# Altium PCB PCB.PcbDoc (part 2 of 3)
Units mm, origin at the board's own origin, x right, y up, seen from the top; angles counter-clockwise.
Board outline 152.4 x 101.6 mm, 2 copper layers (Top Layer, Bottom Layer); 124 components, 87 nets, 375 pads, 305 vias.
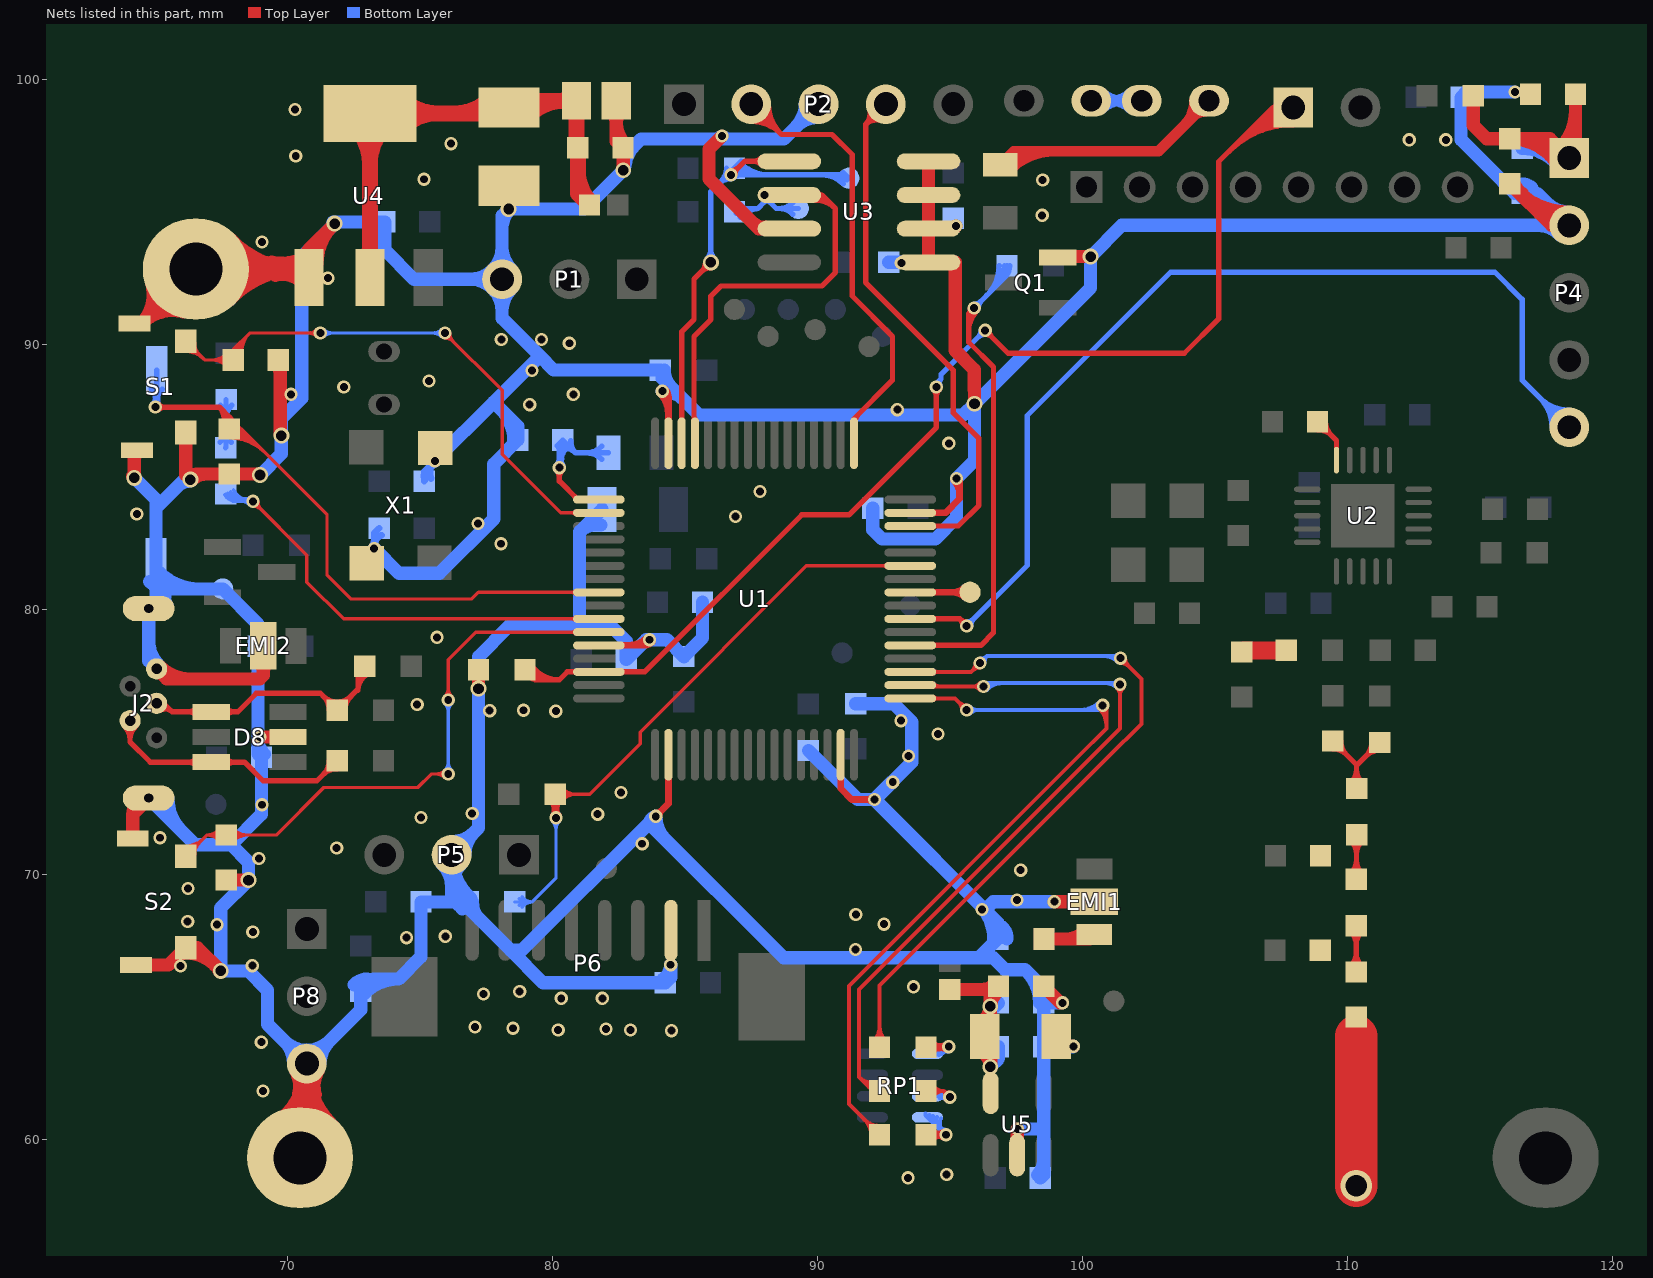
[diagram p2: the nets of this part, all layers, seen from the top]

## Via types
v1: diameter 0.5, hole 0.3, Top Layer to Bottom Layer, 278 vias
v2: diameter 0.6, hole 0.4, Top Layer to Bottom Layer, 23 vias
v3: diameter 0.8, hole 0.5, Top Layer to Bottom Layer, 2 vias
v4: diameter 0.8, hole 0.8, Top Layer to Bottom Layer, 2 vias

## Nets (pads, with @x,y where several pads share a name; then routed paths per layer and width w, separated by ;. In a path a pad name is that pad's centre, name@x,y a point inside that pad or via, vN(x,y) a via of type N, cw(c..) or ccw(c..) an arc to the next point about the centre after c; other vN are vias at no path point) (continued)
CO2_RDY: P4.5 U1.39 | length 43.3
  Top Layer w0.2: U1.39@93.505,79.641 95.365,79.641 v1(95.631,79.375) ; v1@95.481,79.375 ccw(c95.119,79.375) 95.375,79.631 ccw(c95.631,79.887) v1@95.631,79.525
  Bottom Layer w0.2: v1(95.631,79.375) 97.917,81.661 97.917,87.312 103.324,92.719 115.561,92.719 116.586,91.694 116.586,88.646 P4.5@118.364,86.868 ; v1@95.631,79.525 ccw(c95.631,79.887) 95.887,79.631 ccw(c96.143,79.375) v1@95.781,79.375 ; P4.5@117.714,86.868 ccw(c116.145,86.868) 117.254,87.978 ccw(c118.364,89.087) P4.5@118.364,87.518 ; P4.5@117.914,86.868 ccw(c116.828,86.868) 117.596,87.636 ccw(c118.364,88.404) P4.5@118.364,87.318
D_N: D8.6 J2.2 R13.1 | length 13.3
  Top Layer w0.2: J2.2@63.858,75.592 cw(c63.346,75.08) 64.07,75.08 cw(c64.794,75.08) J2.2@64.282,75.592 ; J2.2@64.07,75.804 64.07,74.995 64.831,74.234 D8.6@67.13,74.234 68.387,74.234 69.088,73.533 71.12,73.533 R13.1@71.882,74.295 ; D8.6@66.589,74.093 ccw(c66.247,73.751) 66.247,74.234 ccw(c66.247,74.717) D8.6@66.589,74.375 ; D8.6@67.671,74.093 cw(c68.013,73.751) 68.013,74.234 cw(c68.013,74.717) D8.6@67.671,74.375 ; 71.359,73.772 cw(c71.882,73.249) R13.1@71.882,73.989 ; 71.374,73.787 ccw(c70.873,74.289) R13.1@71.582,74.289
D_P: D8.4 J2.3 R14.1 R15.2 | length 15.6
  Top Layer w0.2: J2.3@65.07,76.454 65.339,76.454 65.659,76.134 ; J2.3@65.119,76.367 cw(c65.265,76.111) 65.474,76.319 ; J2.3@65.218,76.193 cw(c65.4,75.875) 65.659,76.134 ; D8.4@66.589,75.993 ccw(c66.247,75.651) 66.247,76.134 ccw(c66.247,76.617) D8.4@66.589,76.275 ; D8.4@67.671,75.993 cw(c68.013,75.651) 68.013,76.134 cw(c68.013,76.617) D8.4@67.671,76.275 ; 71.359,76.723 ccw(c71.882,77.246) 71.882,76.506 ccw(c71.882,77.246) 72.405,76.723 ; 71.374,76.708 cw(c70.873,76.206) R14.1@71.582,76.206 ; R14.1@72.182,76.206 cw(c72.891,76.206) 72.39,76.708 ; 72.672,76.953 cw(c73.366,76.953) R15.2@73.059,77.576 ; 72.672,77.275 cw(c73.207,77.275) R15.2@72.97,77.755 ; R15.2@72.672,77.978 72.672,76.99 R14.1@71.882,76.2 71.247,76.835 68.834,76.835 68.133,76.134 D8.4@67.13,76.134 65.659,76.134
GND: C1.2 C2.1 C4.2 C5.2 C6.2 C7.2 C8.1 C9.1 C10.1 C11.1 C12.1 C30.1 C31.2 C32.2 C33.2 C35.1 C36.1 C37.2 C38.1 C39.2 C40.2 C41.2 C42.1 C43.2 C44.1 C45.1 C46.1 C47.1 C48.1 C49.1 C50.1 C51.1 D8.2 EMI1.2 EMI2.2 GND.1 J2.5 P1.3 P2.3 P4.2 P5.2 P6.2 P8.3 pad.0 pad.1 Q1.1 R3.1 R5.1 R7.2 R11.1 R12.1 S1. S1.1 S2. S2.1 S3.1 U1.12 U1.18 U1.31 U1.47 U1.63 U3.1 U3.2 U3.3 U3.4 U3.7 U4.1 U5.2 X1.2 X1.4 | length 445.8
  Top Layer w0.254: U1.12@81.755,78.641 83.453,78.641 v1(83.665,78.853) ; 82.857,78.641 ccw(c82.857,79.66) v1@83.578,78.94 ; 83.47,78.641 ccw(c83.47,79.047) v1@83.757,78.76 ; v1@83.542,78.853 cw(c83.245,78.853) 83.455,78.643 cw(c83.665,78.433) v1@83.665,78.73 ; v1(83.902,72.192) 84.38,72.67 U1.18@84.38,74.516 ; v1@83.902,72.315 ccw(c83.902,72.612) 84.112,72.402 ccw(c84.322,72.192) v1@84.025,72.192 ; v1@84.063,88.145 cw(c83.297,87.379) 84.38,87.379 ; v1@84.15,88.109 cw(c84.15,87.812) 84.36,88.022 cw(c84.57,88.232) v1@84.273,88.232 ; v1(84.15,88.232) 84.38,88.002 U1.63@84.38,86.266 ; v1@84.242,88.324 cw(c83.91,87.992) 84.38,87.992 ; U1.31@90.88,74.516 90.88,73.24 91.294,72.826 v1(92.154,72.826) ; v1@92.067,72.739 ccw(c91.857,72.529) 91.857,72.826 ccw(c91.857,73.123) v1@92.067,72.913 ; U1.47@93.505,83.641 94.829,83.641 95.361,84.173 95.361,84.935 v1(95.245,84.935) ; v1@95.158,84.848 cw(c94.667,84.357) 95.361,84.357
  Top Layer w0.5: S2.@64.17,71.361 64.17,72.279 J2.5@64.77,72.879 ; 64.17,72.094 cw(c65.055,72.094) J2.5@64.429,72.72 ; 64.17,72.271 cw(c64.677,72.271) J2.5@64.395,72.692 ; v2@64.17,85.019 v2(64.227,84.962) 64.227,85.902 S1.@64.329,86.004 ; 64.227,85.637 cw(c64.695,85.637) S1.@64.364,85.968 ; S1.@64.24,90.779 S1.@64.49,90.779 ; S2.@64.29,66.586 65.52,66.586 S2.1@66.17,67.236 66.612,67.236 v2(67.489,66.359) ; pad.0@64.874,92.343 cw(c63.393,91.877) S1.@64.49,90.779 ; J2.5@65.07,77.754 65.447,77.377 68.961,77.377 69.098,77.513 EMI2.2@69.098,78.623 ; 65.074,91.363 ccw(c64.28,92.156) pad.0@65.351,92.492 ; 65.126,91.415 cw(c65.928,90.613) pad.0@66.186,91.717 ; J2.5@65.176,77.86 ccw(c66.343,79.027) 66.343,77.377 ; S2.1@65.829,66.895 cw(c66.17,66.553) 66.17,67.036 cw(c66.17,65.487) 67.265,66.582 ; pad.0@66.072,91.23 ccw(c65.687,89.583) S1.@64.49,90.779 ; 66.17,85.437 ccw(c66.886,85.437) v2@66.38,84.931 ; S1.1@66.17,86.667 66.17,85.07 v2(66.344,84.895) 66.555,85.106 C51.1@67.818,85.106 68.972,85.106 v2(68.972,85.068) ; v2@66.38,84.86 cw(c66.974,84.266) 66.974,85.106 ; pad.0@67.482,92.045 cw(c69.327,90.292) 69.327,92.837 cw(c69.327,95.382) pad.0@67.482,93.629 ; C7.2@67.691,69.785 v2(68.537,69.783) v2(68.537,69.783) ; pad.0@67.844,91.7 cw(c70.492,89.185) 70.492,92.837 cw(c70.492,96.489) pad.0@67.844,93.974 ; EMI2.2@68.921,78.046 cw(c68.494,77.619) 69.098,77.619 cw(c69.702,77.619) EMI2.2@69.275,78.046 ; v1(68.961,75.184) D8.2@70.03,75.184 ; 69.413,93.099 ccw(c69.803,94.702) U4.1@70.661,93.293 ; 69.554,92.609 cw(c69.812,91.547) U4.1@70.601,92.304 ; C6.2@69.555,89.295 cw(c69.113,88.853) 69.738,88.853 ; pad.1@69.611,60.64 ccw(c67.982,62.865) P8.3@70.739,62.865 ; 69.61,92.837 ccw(c69.61,94.244) U4.1@70.605,93.249 ; C6.2@69.661,89.408 69.738,89.331 69.738,86.595 v2(69.777,86.556) ; pad.1@69.906,60.237 ccw(c68.704,61.879) 70.739,61.879 ; P8.3@70.306,62.615 cw(c69.261,62.011) 70.427,61.699 cw(c71.592,61.387) P8.3@70.989,62.432 ; P8.3@70.385,62.511 cw(c69.532,61.658) 70.739,61.658 cw(c71.946,61.658) P8.3@71.093,62.511 ; pad.1@70.485,59.309 70.739,59.563 P8.3@70.739,62.865 ; P8.3@70.489,62.432 cw(c69.886,61.387) 71.051,61.699 cw(c72.218,62.011) P8.3@71.172,62.615 ; U4.1@70.617,93.037 cw(c71.458,93.037) 70.863,93.631 ; 70.739,61.676 ccw(c72.9,61.676) pad.1@71.389,60.131 ; U4.1@71.117,93.037 cw(c73.165,93.037) v2@71.717,94.485 ; pad.1@71.739,60.489 cw(c74.063,62.865) P8.3@70.739,62.865 ; v2(71.784,94.552) 70.817,93.585 U4.1@70.817,92.512 70.492,92.837 pad.0@66.548,92.837 S1.@64.49,90.779 ; v2(77.216,77.012) R12.1@77.216,77.724 ; C44.1@82.199,98.825 cw(c81.687,98.313) 82.411,98.313 cw(c83.135,98.313) C44.1@82.623,98.825 ; 82.411,98.381 ccw(c83.627,98.381) C45.1@82.767,97.522 ; C44.1@82.411,99.187 82.411,97.659 C45.1@82.661,97.409 82.677,97.393 v2(82.677,96.567) ; C45.1@82.555,97.296 cw(c82.26,97.002) 82.677,97.002 ; v1(86.403,97.862) 85.911,97.37 85.911,96.233 87.783,94.361 U3.7@88.942,94.361 ; 87.514,94.63 ccw(c88.042,95.158) U3.7@88.042,94.411 ; U3.4@94.192,96.901 U3.3@94.192,95.631 U3.2@94.192,94.361 ; U3.2@94.988,94.361 ccw(c94.988,94.7) v1(95.228,94.46) 95.128,94.361 U3.2@94.192,94.361 ; U3.1@95.057,93.056 cw(c94.72,92.719) 95.196,92.719 ; v2(95.929,87.757) 95.929,88.273 95.916,88.286 95.916,89.046 95.196,89.766 95.196,93.091 U3.1@94.192,93.091 U3.2@94.192,94.361 ; U5.2@97.536,59.404 97.536,60.387 v1(97.545,60.396) ; C50.1@98.536,65.786 99.166,65.156 v1(99.246,65.156) ; v1(98.938,68.971) EMI1.2@100.447,68.971 ; C47.1@99.013,63.881 C47.1@99.379,63.515 ; Q1.1@99.069,93.279 99.098,93.308 v2(100.306,93.308) ; C47.1@99.183,63.711 ccw(c99.656,64.184) v1(99.656,63.515) ; EMI1.2@99.87,68.794 ccw(c99.443,68.367) 99.443,68.971 ccw(c99.443,69.575) EMI1.2@99.87,69.148 ; C32.2@116.128,96.056 117.696,94.488 P4.2@118.364,94.488 cw(c118.364,96.101) 117.224,94.96 ; C32.2@116.28,96.095 ccw(c116.932,96.269) 116.594,95.684 ; C32.2@116.37,95.814 ccw(c118.364,97.808) P4.2@118.364,94.988 ; 67.254,66.589 cw(c67.054,66.242) 67.44,66.346 ccw(c67.054,66.242) 67.254,66.589
  Bottom Layer w0.254: v1@73.192,82.383 ccw(c72.982,82.593) 73.279,82.593 ccw(c73.576,82.593) v1@73.366,82.383 ; v1@73.279,82.395 cw(c73.703,82.395) C4.2@73.56,82.794 ; v1@73.279,82.423 73.279,82.869 C4.2@73.468,83.058 ; 73.324,82.564 ccw(c73.516,82.513) v1@73.37,82.379 ; C2.1@75.168,84.836 75.168,85.201 v1(75.565,85.598) ccw(c76.004,85.159) C2.1@75.423,84.939 ; C2.1@75.186,84.849 cw(c75.601,85.006) 75.287,85.32 ; v1@75.442,85.598 cw(c75.145,85.598) 75.355,85.388 cw(c75.565,85.178) v1@75.565,85.475 ; v1@75.446,85.566 cw(c75.159,85.489) 75.417,85.341 cw(c75.674,85.192) v1@75.597,85.479
  Bottom Layer w0.5: v2(64.227,84.962) 65.048,84.141 65.048,83.827 ; J2.5@64.611,79.87 cw(c64.227,79.486) 64.77,79.486 cw(c65.313,79.486) J2.5@64.929,79.87 ; J2.5@64.77,72.879 66.529,71.12 67.883,71.12 ; 64.77,78.84 ccw(c66.156,78.84) J2.5@65.176,77.86 ; S3.1@64.801,81.05 ccw(c65.47,81.719) 65.47,80.772 ; S3.1@65.048,81.108 ccw(c66.349,81.108) J2.5@65.429,80.188 ; J2.5@65.07,77.754 64.77,78.054 J2.5@64.77,80.029 J2.5@65.048,80.307 ; 65.125,80.821 cw(c65.636,80.957) S3.1@65.178,81.222 ; S3.1@65.154,81.403 ccw(c66.678,82.927) 66.678,80.772 ; J2.5@65.456,80.156 cw(c65.855,80.429) 65.513,80.772 ; J2.5@65.495,72.879 ccw(c67.245,72.879) 66.008,71.641 ; 65.87,84.649 cw(c66.344,84.174) v2@66.344,84.845 ; v2(66.344,84.895) 66.116,84.895 65.048,83.827 ; v1@68.896,75.104 ccw(c69.702,75.104) C40.2@69.132,74.535 ; v2(68.972,85.068) 69.777,85.872 v2(69.777,86.556) 69.777,87.198 70.542,87.963 70.542,93.311 v2(71.784,94.552) 71.721,94.615 C42.1@73.676,94.615 73.676,93.56 74.78,92.456 P1.3@78.105,92.456 ; P8.3@70.239,62.865 ccw(c69.032,62.865) 69.885,63.719 ccw(c70.739,64.572) 70.739,63.365 ccw(c70.739,64.572) 71.593,63.719 ccw(c72.446,62.865) P8.3@71.239,62.865 ; C39.2@72.524,65.835 cw(c73.031,65.352) 73.031,66.053 ; C39.2@72.886,65.491 cw(c74.198,64.242) 74.198,66.053 ; v1(73.279,82.296) 74.212,81.363 75.74,81.363 77.786,83.409 77.786,85.481 C1.2@78.694,86.39 78.694,86.91 77.786,87.819 ; v1(75.565,85.598) 77.786,87.819 ; P5.2@75.846,70.385 cw(c74.993,69.532) 76.2,69.532 cw(c77.407,69.532) P5.2@76.554,70.385 ; 76.2,69.611 ccw(c77.418,69.611) R11.1@76.6,68.708 ; P5.2@76.2,71.239 ccw(c76.2,72.446) 77.054,71.593 ccw(c77.907,70.739) P5.2@76.7,70.739 ; R11.1@76.828,69.117 cw(c76.789,69.949) 76.2,69.36 ; R11.1@76.936,69.079 cw(c78.441,70.739) P5.2@76.2,70.739 ; R11.1@76.985,68.954 ccw(c77.9,68.955) 77.253,68.307 ; 78.075,87.529 cw(c76.942,86.396) C1.2@78.544,86.396 ; 78.105,94.388 cw(c79.069,94.388) v2@78.387,95.07 ; P1.3@78.459,92.102 ccw(c79.312,91.249) 78.105,91.249 ccw(c76.898,91.249) 77.751,92.102 ccw(c76.898,91.249) 76.898,92.456 ccw(c76.898,93.663) 77.751,92.81 ccw(c76.898,93.663) 78.105,93.663 ccw(c79.312,93.663) P1.3@78.459,92.81 ; C12.1@81.826,83.178 ccw(c81.672,82.279) 81.027,82.924 ; C12.1@81.877,83.774 81.027,82.924 ; v2@82.727,96.567 cw(c84.081,96.567) 83.124,97.525 ; 83.647,71.831 cw(c84.029,71.831) v1(83.902,72.192) ccw(c85.135,72.192) 84.263,71.32 ; v1(84.15,88.232) cw(c84.15,87.065) 84.975,87.89 ; C37.2@84.178,66.043 ccw(c83.798,66.592) v1(84.465,66.592) ; R3.1@84.224,89.021 ccw(c85.141,89.021) 84.493,88.372 ; C5.2@85.663,80.264 85.663,78.916 C8.1@84.963,78.216 84.326,78.853 v1(83.665,78.853) 83.536,78.853 C9.1@82.788,78.105 82.788,78.796 82.242,79.342 81.027,79.342 ; 86.118,97.744 ccw(c86.118,98.147) v1(86.403,97.862) ccw(c86.688,98.147) 86.688,97.744 ; P2.3@89.543,99.06 cw(c88.336,99.06) 89.189,98.206 cw(c90.043,97.353) P2.3@90.043,98.56 ; R5.1@89.662,74.676 89.664,74.676 91.513,72.826 v1(92.154,72.826) ; P2.3@90.043,99.06 88.727,97.744 83.342,97.744 82.689,97.09 82.689,96.567 v2(82.677,96.567) 81.215,95.105 v2(78.352,95.105) 78.105,94.858 P1.3@78.105,92.456 ; C10.1@91.44,76.438 92.875,76.438 93.562,75.751 93.562,74.234 v1(92.154,72.826) ; C11.1@92.091,83.82 92.091,82.999 92.439,82.652 94.444,82.652 95.245,83.452 v1(95.245,84.935) 95.929,85.618 v2(95.929,87.757) ; C30.1@92.694,93.091 v1@93.141,93.091 ; v1@96.116,68.864 cw(c94.823,67.57) R7.2@96.652,67.57 ; v1@96.325,68.665 96.631,68.971 v1(98.938,68.971) ; 96.97,68.01 cw(c96.53,67.57) R7.2@97.152,67.57 ; v1(97.545,60.396) 98.528,60.396 98.536,60.388 ; 97.892,66.35 cw(c96.699,65.157) C49.1@98.386,65.157 ; C46.1@98.303,58.66 ccw(c97.74,59.222) 98.536,59.222 ; C46.1@98.409,58.547 98.536,58.674 98.536,60.388 ; v1(99.246,65.156) 99.242,65.151 C49.1@98.536,65.151 ; v1(99.656,63.515) 99.642,63.5 C48.1@98.536,63.5 ; C38.1@114.39,99.214 cw(c115.122,98.483) 115.122,99.518 ; 115.846,96.147 ccw(c116.58,96.88) C33.2@116.58,95.843 ; v1(116.321,99.518) 114.488,99.518 C38.1@114.284,99.314 114.284,97.709 116.3,95.693 C33.2@116.586,95.693 117.159,95.693 P4.2@118.364,94.488 101.486,94.488 v2(100.306,93.308) 100.306,92.135 v2(95.929,87.757) ; C33.2@116.592,95.543 cw(c116.592,93.813) 117.816,95.036 ; C33.2@116.592,96.043 cw(c116.592,95.52) C33.2@116.962,95.89 ; P4.2@117.864,94.488 ccw(c116.657,94.488) 117.51,95.342 ccw(c118.364,96.195) P4.2@118.364,94.988 ; P4.2@118.01,94.134 ccw(c117.157,93.281) 117.157,94.488 ccw(c117.157,95.695) P4.2@118.01,94.842 ; J2.5@65.048,80.307 65.513,80.772 ; J2.5@65.048,80.307 S3.1@65.048,81.797 65.048,83.827 ; 65.513,80.772 GND.1@67.564,80.772 68.896,79.44 C41.2@68.896,78.613 68.896,74.552 C40.2@69.026,74.422 69.026,72.263 67.883,71.12 ; 67.883,71.12 68.537,70.466 v2(68.537,69.783) 67.489,68.734 v2(67.489,66.359) 68.524,66.359 69.254,65.629 69.254,64.35 P8.3@70.739,62.865 72.771,64.897 C39.2@72.771,65.594 73.23,66.053 74.198,66.053 ; 74.198,66.053 75.041,66.896 C36.1@75.041,68.961 76.246,68.961 76.2,69.007 76.2,69.36 ; 76.2,69.36 78.424,67.137 ; 76.2,69.36 P5.2@76.2,70.739 ; P5.2@76.2,70.739 77.216,71.755 v2(77.216,77.012) 77.216,78.22 78.338,79.342 81.027,79.342 ; 77.786,87.819 79.52,89.553 79.52,89.559 ; P1.3@78.105,92.456 78.105,90.974 79.52,89.559 ; 78.424,67.137 79.647,65.913 C37.2@84.263,65.913 ; 78.424,67.137 78.846,67.137 83.647,71.937 88.727,66.856 96.094,66.856 ; 79.52,89.559 80.052,89.027 R3.1@84.074,89.027 84.15,88.951 84.15,88.715 85.529,87.336 95.507,87.336 v2(95.929,87.757) ; 81.027,79.342 81.027,82.924 ; C37.2@84.263,65.913 ccw(c83.737,66.439) v1(84.465,66.592) ; C37.2@84.263,65.913 84.465,66.115 v1(84.465,66.592) ; v1(92.154,72.826) 96.802,68.178 R7.2@96.802,67.564 96.094,66.856 ; 96.094,66.856 96.633,66.856 97.081,66.407 97.835,66.407 98.536,65.706 C49.1@98.536,65.151 ; 98.536,60.388 C48.1@98.536,63.5 ; C48.1@98.536,63.5 C49.1@98.536,65.151
  other v1: 93.422,58.553 94.879,58.679 69.086,61.832 69.021,63.669 84.494,64.103 80.222,64.126 82.946,64.126 82.023,64.173 78.513,64.196 77.081,64.242 80.337,65.327 81.884,65.327 77.404,65.489 78.767,65.581 93.626,65.759 65.971,66.548 68.683,66.559 91.433,67.169 74.5,67.614 75.962,67.663 68.7,67.827 67.344,68.102 92.514,68.124 66.243,68.225 91.449,68.485 96.21,68.673 97.526,69.033 66.254,69.467 97.667,70.161 68.928,70.6 71.864,70.998 83.389,71.157 65.197,71.384 75.044,72.147 81.71,72.271 76.974,72.295 69.045,72.628 82.593,73.086 92.843,73.482 93.438,74.468 94.55,75.299 93.156,75.8 80.131,76.159 77.636,76.176 78.909,76.193 74.903,76.413 75.65,78.943 78.06,82.474 77.194,83.238 86.906,83.507 64.326,83.594 87.83,84.447 94.957,86.264 93.015,87.532 79.147,87.72 70.142,88.114 80.794,88.111 72.135,88.386 75.349,88.615 79.232,89.01 80.64,90.039 78.077,90.182 79.588,90.182 71.529,92.493 93.164,93.068 69.051,93.859 98.482,94.863 98.497,96.195 75.157,96.226 70.32,97.106 76.176,97.567 112.329,97.714 113.708,97.714 70.288,98.856
I2C_SCL: R1.1 SCL.1 U1.61 U3.6 | length 22.7
  Top Layer w0.2: 85.344,87.299 ccw(c85.588,87.299) U1.61@85.415,87.126 ; U1.61@85.38,86.266 85.344,86.302 85.344,90.297 85.979,90.932 85.979,91.821 86.36,92.202 90.17,92.202 90.678,92.71 90.678,95.123 ; U3.6@88.942,95.631 90.17,95.631 ; U3.6@89.842,95.631 cw(c89.888,94.955) 90.367,95.434 ; U3.6@89.856,95.431 cw(c89.927,94.373) 90.678,95.123 ; U3.6@90.02,95.539 cw(c90.17,95.462) 90.17,95.631 ; U3.6@90.02,95.723 ccw(c90.17,95.8) 90.17,95.631 ; 90.17,95.631 90.678,95.123
  Bottom Layer w0.2: R1.1@86.939,94.932 cw(c87.4,94.47) 87.4,95.123 ; R1.1@87.08,94.79 cw(c87.883,93.987) 87.691,95.107 ; R1.1@87.08,95.215 ccw(c87.301,95.436) 87.301,95.123 ; R1.1@87.122,95.25 87.249,95.123 87.757,95.123 88.011,95.377 v1@88.011,95.559 ; v1(88.011,95.631) v1@88.011,95.559 ; SCL.1@89.069,94.911 ccw(c88.557,94.399) 88.557,95.123 ccw(c88.557,95.847) SCL.1@89.069,95.335 ; SCL.1@89.281,95.123 88.447,95.123 v1@88.011,95.559
I2C_SDA: R2.1 SDA.1 U1.62 U3.5 | length 29.1
  Top Layer w0.2: U1.62@84.88,86.266 84.88,90.468 85.344,90.932 85.344,92.456 v2(85.979,93.091) ; v2@85.779,93.091 cw(c85.296,93.091) 85.638,92.75 cw(c85.979,92.408) v2@85.979,92.891 ; v1(86.741,96.393) 87.249,96.901 U3.5@88.942,96.901 ; v1@86.741,96.543 ccw(c86.741,96.905) 86.997,96.649 ccw(c87.253,96.393) v1@86.891,96.393 ; U3.5@87.901,96.76 ccw(c87.559,96.418) 87.559,96.901 ccw(c87.559,97.384) U3.5@87.901,97.042
  Bottom Layer w0.2: v2@85.838,93.232 ccw(c85.496,93.574) 85.979,93.574 ccw(c86.462,93.574) v2@86.12,93.232 ; v2(85.979,93.091) 85.979,95.758 R2.1@86.868,96.647 ; 86.268,96.047 cw(c86.741,95.574) R2.1@86.741,96.243 ; 86.345,96.124 cw(c86.868,95.601) R2.1@86.868,96.341 ; 86.36,96.139 ccw(c85.859,96.641) R2.1@86.568,96.641 ; 86.447,96.19 cw(c86.781,96.1) R2.1@86.734,96.443 ; v1(86.741,96.393) 91.059,96.393 SDA.1@91.186,96.266 ; R2.1@86.797,96.57 ccw(c87.224,96.997) R2.1@87.224,96.393 ; R2.1@86.847,96.287 cw(c87.103,96.031) 87.103,96.393 cw(c87.103,96.755) R2.1@86.847,96.499 ; R2.1@86.891,96.393 cw(c87.56,96.393) R2.1@87.087,96.866 ; R2.1@86.939,96.711 ccw(c87.707,97.479) 87.707,96.393 ; R2.1@87.08,96.853 ccw(c88.19,97.962) 88.19,96.393 ; R2.1@87.122,96.901 R2.1@86.868,96.647 ; 90.155,96.393 cw(c90.155,95.235) SDA.1@90.974,96.054 ; 90.638,96.393 cw(c90.638,95.718) SDA.1@91.115,96.195 ; 90.768,96.393 ccw(c90.768,96.684) SDA.1@90.974,96.478 ; R2.1@86.868,96.647 ccw(c86.954,96.561) 86.859,96.486 cw(c86.954,96.561) R2.1@86.868,96.647
IR_INPUT: R10.2 R11.2 U1.43 | length 31
  Top Layer w0.127: R10.2@79.871,72.781 cw(c79.229,72.139) v1@80.137,72.139 ; R10.2@79.961,72.87 cw(c79.536,72.445) 80.137,72.445 ; v1@79.975,72.229 ccw(c79.584,72.455) 80.021,72.573 ; v1@80.005,72.268 ccw(c79.687,72.586) 80.137,72.586 ccw(c80.587,72.586) v1@80.269,72.268 ; 80.022,72.57 ccw(c80.454,72.686) v1@80.23,72.298 ; v1@80.044,72.298 ccw(c79.879,72.582) 80.197,72.497 ; v1(80.137,72.136) 80.137,72.997 R10.2@80.109,73.025 81.407,73.025 83.312,74.93 83.312,75.367 89.586,81.641 U1.43@93.505,81.641 ; v1@80.137,72.274 cw(c80.854,72.274) R10.2@80.347,72.781 ; 80.137,72.58 cw(c80.547,72.58) R10.2@80.257,72.87 ; 80.217,72.572 ccw(c80.57,72.478) v1@80.283,72.252 ; R10.2@80.257,72.877 cw(c80.615,72.519) 80.615,73.025 cw(c80.615,73.531) R10.2@80.257,73.173 ; R10.2@80.347,72.787 cw(c80.921,72.213) 80.921,73.025 cw(c80.921,73.837) R10.2@80.347,73.263 ; U1.43@92.619,81.58 ccw(c92.471,81.432) 92.471,81.641 ccw(c92.471,81.85) U1.43@92.619,81.702
  Bottom Layer w0.127: R11.2@78.585,68.961 79.248,68.961 ; R11.2@78.754,68.837 cw(c78.998,68.659) 78.998,68.961 cw(c78.998,69.263) R11.2@78.754,69.085 ; R11.2@78.857,68.762 cw(c79.248,68.476) 79.248,68.961 ; R11.2@78.857,69.16 ccw(c79.248,69.446) 79.248,68.961 ; v1@80.005,72.004 cw(c79.687,71.686) 80.137,71.686 cw(c80.587,71.686) v1@80.269,72.004 ; v1(80.137,72.136) 80.137,69.85 79.248,68.961
IR_OUTPUT: R9.1 U1.37 | length 23
  Top Layer w0.2: U1.37@93.505,78.641 96.167,78.641 96.647,79.121 96.647,89.14 95.709,90.077 95.709,91.147 ; 95.709,90.506 cw(c96.776,90.506) v1@96.022,91.26 ; 95.709,90.989 cw(c96.293,90.989) v1@95.88,91.401 ; v1@95.768,91.338 cw(c95.558,91.298) 95.709,91.147 ; v1@95.902,91.217 ccw(c95.88,90.976) 95.709,91.147 ; v1(95.916,91.366) 95.916,91.353 95.709,91.147
  Bottom Layer w0.2: v1(95.916,91.366) 97.155,92.605 R9.1@97.155,92.964 ; v1@95.916,91.516 ccw(c95.916,91.878) 96.172,91.622 ccw(c96.428,91.366) v1@96.066,91.366 ; 96.394,91.844 ccw(c95.281,92.958) R9.1@96.855,92.958 ; 96.735,92.186 ccw(c95.964,92.958) R9.1@97.055,92.958 ; 97.077,92.527 ccw(c96.646,92.958) R9.1@97.255,92.958
JTCK: P2.2 U1.49 | length 21.2
  Top Layer w0.2: P2.2@87.503,98.41 cw(c87.503,96.841) 88.613,97.95 cw(c89.722,99.06) P2.2@88.153,99.06 ; P2.2@87.503,98.61 cw(c87.503,97.524) 88.271,98.292 cw(c89.039,99.06) P2.2@87.953,99.06 ; P2.2@87.503,99.06 88.646,97.917 90.551,97.917 91.313,97.155 91.313,91.821 92.837,90.297 92.837,88.646 91.38,87.189 U1.49@91.38,86.266 ; U1.49@91.43,87.091 cw(c91.787,87.091) 91.535,87.344
JTMS: P2.4 U1.46 | length 21.4
  Top Layer w0.2: P2.4@91.962,98.868 cw(c91.419,98.7) 91.821,98.298 ; P2.4@92.391,98.439 ccw(c92.223,97.896) 91.821,98.298 ; P2.4@92.583,99.06 91.821,98.298 ; U1.46@93.505,83.141 95.312,83.141 96.091,83.919 96.091,86.452 95.123,87.42 95.123,89.027 91.821,92.329 91.821,98.298
KEY1: C6.1 S1.2 U1.2 | length 31.2
  Top Layer w0.127: S1.2@66.17,89.731 cw(c66.17,88.797) 66.83,89.457 ; S1.2@66.17,89.858 cw(c66.17,89.231) 66.613,89.674 ; S1.2@66.17,90.117 66.879,89.408 C6.1@67.961,89.408 67.961,89.805 68.58,90.424 ; S1.2@66.379,90.067 ccw(c66.765,90.067) S1.2@66.492,89.795 ; S1.2@66.506,90.067 ccw(c67.198,90.067) 66.709,89.578 ; C6.1@67.723,89.17 ccw(c67.149,88.596) 67.149,89.408 ccw(c67.149,90.22) C6.1@67.723,89.646 ; C6.1@67.813,89.26 ccw(c67.455,88.902) 67.455,89.408 ccw(c67.455,89.914) C6.1@67.813,89.556 ; C6.1@67.917,89.406 cw(c68.476,89.515) 68.074,89.918 ; C6.1@68.042,89.43 cw(c68.759,89.57) 68.242,90.086 ; C6.1@68.167,89.455 cw(c69.041,89.625) 68.411,90.255 ; C6.1@68.291,89.479 cw(c69.324,89.68) 68.58,90.424 ; v1@71.115,90.292 ccw(c70.797,89.974) 70.797,90.424 ccw(c70.797,90.874) v1@71.115,90.556 ; v1(71.247,90.424) 68.58,90.424 ; v1@75.946,90.238 cw(c75.946,89.787) 76.264,90.106 cw(c76.583,90.424) v1@76.132,90.424 ; v1(75.946,90.424) 78.105,88.265 78.105,85.852 80.316,83.641 U1.2@81.755,83.641 ; U1.2@80.869,83.58 ccw(c80.721,83.432) 80.721,83.641 ccw(c80.721,83.85) U1.2@80.869,83.702
  Bottom Layer w0.127: v1(71.247,90.424) v1(75.946,90.424) ; v1@71.379,90.292 cw(c71.697,89.974) 71.697,90.424 cw(c71.697,90.874) v1@71.379,90.556 ; v1@75.814,90.292 ccw(c75.496,89.974) 75.496,90.424 ccw(c75.496,90.874) v1@75.814,90.556
KEY2: C51.2 S3.2 U1.8 | length 33.6
  Top Layer w0.127: C51.2@67.818,86.806 68.261,86.806 ; C51.2@67.824,86.469 cw(c67.824,84.603) 69.144,85.923 ; C51.2@67.824,86.596 cw(c67.824,85.037) 68.927,86.14 ; C51.2@67.824,86.723 cw(c67.824,85.471) 68.71,86.357 ; C51.2@67.824,86.85 cw(c67.824,85.904) 68.494,86.573 ; C51.2@67.824,86.977 cw(c67.824,86.338) 68.277,86.79 ; C51.2@68.15,86.72 cw(c68.261,86.691) 68.261,86.806 ; C51.2@68.15,86.892 ccw(c68.261,86.921) 68.261,86.806 ; U1.8@80.869,80.58 ccw(c80.721,80.432) 80.721,80.641 ccw(c80.721,80.85) U1.8@80.869,80.702 ; U1.8@81.755,80.641 77.212,80.641 76.962,80.391 72.39,80.391 71.501,81.28 71.501,83.566 68.261,86.806
  Top Layer w0.2: v1(65.024,87.63) 67.437,87.63 ; v1@65.13,87.524 cw(c65.386,87.268) 65.386,87.63 cw(c65.386,87.992) v1@65.13,87.736 ; C51.2@67.545,86.943 ccw(c67.02,87.213) 67.437,87.63 ; 67.631,87.436 cw(c67.276,87.081) C51.2@67.723,86.852 ; C51.2@67.707,87.085 ccw(c67.641,87.249) 67.818,87.249 ; C51.2@67.818,86.806 67.818,87.249 ; 67.825,87.242 cw(c67.532,86.949) C51.2@67.9,86.76 ; C51.2@67.929,87.085 cw(c67.995,87.249) 67.818,87.249 ; 67.437,87.63 67.818,87.249
  Bottom Layer w0.2: S3.2@64.864,88.315 cw(c64.352,87.803) 65.076,87.803 cw(c65.8,87.803) S3.2@65.288,88.315 ; v1@64.918,87.736 ccw(c64.536,88.118) 65.076,88.118 ; v1@64.934,87.75 ccw(c64.787,87.943) 65.022,88.006 ; v1@64.949,87.76 ccw(c64.759,88.09) 65.127,87.991 ; v1@65.076,87.682 S3.2@65.076,89.027 ; 65.12,87.965 ccw(c65.451,87.877) v1@65.154,87.705
KEY3: C7.1 S2.2 U1.11 | length 30.6
  Top Layer w0.127: S2.2@66.17,70.686 66.969,71.485 C7.1@67.691,71.485 69.58,71.485 71.374,73.279 74.93,73.279 75.438,73.787 v1(76.073,73.787) ; S2.2@66.17,70.945 ccw(c66.17,71.572) 66.613,71.129 ; S2.2@66.17,71.072 ccw(c66.17,72.006) 66.83,71.346 ; S2.2@66.379,70.736 cw(c66.765,70.736) S2.2@66.492,71.008 ; S2.2@66.506,70.736 cw(c67.198,70.736) 66.709,71.225 ; C7.1@67.425,71.27 ccw(c66.969,70.893) 66.969,71.485 ccw(c66.969,72.077) C7.1@67.425,71.7 ; C7.1@67.523,71.351 ccw(c67.239,71.116) 67.239,71.485 ccw(c67.239,71.854) C7.1@67.523,71.619 ; C7.1@67.846,71.337 cw(c68.203,70.979) 68.203,71.485 cw(c68.203,71.991) C7.1@67.846,71.633 ; C7.1@67.935,71.247 cw(c68.51,70.673) 68.51,71.485 cw(c68.51,72.297) C7.1@67.935,71.723 ; v1@75.941,73.655 ccw(c75.623,73.337) 75.623,73.787 ccw(c75.623,74.237) v1@75.941,73.919 ; v1@75.941,76.713 ccw(c75.623,77.031) 76.073,77.031 ccw(c76.523,77.031) v1@76.205,76.713 ; v1(76.073,76.581) 76.073,78.105 77.109,79.141 U1.11@81.755,79.141 ; U1.11@80.869,79.08 ccw(c80.721,78.932) 80.721,79.141 ccw(c80.721,79.35) U1.11@80.869,79.202
  Bottom Layer w0.127: v1@75.941,73.919 ccw(c75.623,74.237) 76.073,74.237 ccw(c76.523,74.237) v1@76.205,73.919 ; v1@75.941,76.449 cw(c75.623,76.131) 76.073,76.131 cw(c76.523,76.131) v1@76.205,76.449 ; v1(76.073,73.787) v1(76.073,76.581)
LED_G1: D4.2 U1.34 | length 33
  Top Layer w0.15: 91.759,62.165 ccw(c92.178,62.584) D4.2@92.309,62.006 ; D4.2@91.951,61.973 ccw(c92.249,62.271) D4.2@92.342,61.86 ; D4.2@92.276,62.152 cw(c92.107,62.897) 91.567,62.357 ; D4.2@92.348,61.829 92.095,61.829 91.567,62.357 ; U1.34@93.505,77.141 93.557,77.089 v1(96.266,77.089) ; U1.34@94.383,77.194 ccw(c94.637,77.448) 94.637,77.089 ; v1@96.142,76.965 ccw(c95.844,76.667) 95.844,77.089 ccw(c95.844,77.511) v1@96.142,77.213 ; v1@101.294,77.047 cw(c100.995,76.748) 101.418,76.748 cw(c101.84,76.748) v1@101.541,77.047 ; v1(101.418,77.17) 101.418,75.51 91.567,65.659 91.567,62.357
  Bottom Layer w0.15: v1(96.266,77.089) 96.393,77.216 101.372,77.216 v1(101.418,77.17) ; v1@96.284,77.071 cw(c96.633,76.722) 96.633,77.216 ; v1@96.39,76.965 cw(c96.995,76.36) 96.995,77.216 ; 100.885,77.216 cw(c100.885,76.638) v1@101.294,77.047 ; 101.105,77.216 ccw(c101.105,77.483) v1@101.294,77.294
LED_G2: D5.2 U1.33 | length 34.5
  Top Layer w0.15: 91.782,60.744 ccw(c92.348,61.31) D5.2@92.348,60.51 ; 91.798,60.728 cw(c91.254,60.184) D5.2@92.023,60.184 ; D5.2@92.038,60.488 ccw(c92.348,60.798) D5.2@92.348,60.36 ; D5.2@92.054,60.472 cw(c91.766,60.184) D5.2@92.173,60.184 ; D5.2@92.095,60.178 D5.2@92.348,60.178 91.186,61.34 91.186,65.786 99.822,74.422 100.9,75.5 100.9,76.243 v1(100.763,76.38) ; U1.33@93.505,76.641 95.19,76.641 v1(95.631,76.2) ; U1.33@94.383,76.588 cw(c94.511,76.46) 94.511,76.641 cw(c94.511,76.822) U1.33@94.383,76.694 ; v1@95.456,76.2 ccw(c95.034,76.2) 95.332,76.499 ccw(c95.631,76.797) v1@95.631,76.375 ; v1@100.639,76.256 cw(c100.009,75.626) 100.9,75.626 ; v1@100.745,76.362 cw(c100.372,75.989) 100.9,75.989
  Bottom Layer w0.15: v1(95.631,76.2) 100.583,76.2 v1(100.763,76.38) ; v1@95.755,76.076 cw(c96.053,75.778) 96.053,76.2 cw(c96.053,76.622) v1@95.755,76.324 ; 99.907,76.2 ccw(c99.907,77.236) v1@100.639,76.503 ; 100.269,76.2 ccw(c100.269,76.874) v1@100.745,76.397
LED_R: D2.2 U1.35 | length 32
  Top Layer w0.15: D2.2@92.118,63.716 ccw(c91.563,64.271) 92.348,64.271 ccw(c93.133,64.271) D2.2@92.578,63.716 ; D2.2@92.224,63.61 ccw(c91.926,63.909) 92.348,63.909 ccw(c92.77,63.909) D2.2@92.472,63.61 ; D2.2@92.348,63.48 92.348,65.805 100.965,74.422 102.221,75.678 102.221,77.372 v1(101.435,78.159) ; U1.35@93.505,77.641 95.802,77.641 v1(96.139,77.978) ; U1.35@94.383,77.588 cw(c94.511,77.46) 94.511,77.641 cw(c94.511,77.822) U1.35@94.383,77.694 ; v1@95.964,77.978 cw(c95.542,77.978) 95.84,77.679 cw(c96.139,77.381) v1@96.139,77.803 ; v1@101.435,77.984 cw(c101.435,77.561) 101.734,77.86 cw(c102.032,78.159) v1@101.61,78.159
  Bottom Layer w0.15: v1(96.139,77.978) 96.393,78.232 ; v1@96.16,78.152 ccw(c96.194,78.431) 96.393,78.232 ; v1@96.313,77.999 cw(c96.592,78.033) 96.393,78.232 ; 100.836,78.232 cw(c100.836,77.56) v1@101.311,78.035 ; 101.189,78.232 ccw(c101.189,78.405) v1@101.311,78.283 ; v1(101.435,78.159) 101.362,78.232 96.393,78.232
LED_Y: D3.2 U1.10 | length 22.5
  Top Layer w0.127: v1@68.707,83.888 cw(c68.707,83.437) 69.025,83.756 cw(c69.344,84.074) v1@68.893,84.074 ; v1(68.707,84.074) 70.739,82.042 70.739,81.026 72.124,79.641 U1.10@81.755,79.641 ; U1.10@80.869,79.58 ccw(c80.721,79.432) 80.721,79.641 ccw(c80.721,79.85) U1.10@80.869,79.702
  Bottom Layer w0.127: D3.2@67.638,84.326 ccw(c68.063,84.559) D3.2@68.063,84.074 ; D3.2@67.671,84.347 67.944,84.074 v1(68.707,84.074) cw(c68.707,84.912) D3.2@67.973,84.509 ; D3.2@67.75,84.387 ccw(c68.278,84.676) 68.278,84.074 ; D3.2@67.861,84.448 ccw(c68.492,84.794) v1@68.492,84.074 ; 68.225,84.146 ccw(c68.334,84.549) v1@68.592,84.221 ; 68.387,84.102 cw(c68.32,83.85) v1@68.545,83.981 ; v1@68.543,83.985 ccw(c68.182,83.789) 68.288,84.186 ccw(c68.394,84.583) v1@68.609,84.233 ; v1@68.575,83.942 ccw(c68.257,83.624) 68.257,84.074 ccw(c68.257,84.524) v1@68.575,84.206
LIGHT_SENSE: P7.1 R12.2 U1.14 | length 58.2
  Top Layer w0.2: R12.2@78.884,77.66 ccw(c79.494,78.088) 79.494,77.343 ; R12.2@78.966,77.724 79.347,77.343 80.264,77.343 ; R12.2@79.048,77.775 ccw(c79.879,78.359) 79.879,77.343 ; R12.2@79.211,77.89 ccw(c80.264,78.629) 80.264,77.343 ; v1@94.382,88.286 cw(c94.126,88.03) 94.488,88.03 cw(c94.85,88.03) v1@94.594,88.286 ; v1(94.488,88.392) 94.488,86.868 91.186,83.566 89.408,83.566 83.483,77.641 U1.14@81.755,77.641 80.562,77.641 80.264,77.343 ; v1@96.328,90.378 cw(c96.328,90.016) 96.584,90.272 cw(c96.84,90.528) v1@96.478,90.528 ; v1(96.328,90.528) 97.194,89.662 103.841,89.662 105.138,90.959 105.138,96.885 107.186,98.933 ; 105.537,97.283 cw(c107.95,94.87) P7.1@107.95,98.283 ; 105.878,97.625 cw(c107.95,95.553) P7.1@107.95,98.483 ; 106.22,97.966 cw(c107.95,96.236) P7.1@107.95,98.683 ; 106.561,98.308 cw(c107.95,96.919) P7.1@107.95,98.883 ; 106.902,98.649 cw(c107.95,97.602) P7.1@107.95,99.083 ; P7.1@107.308,98.829 ccw(c107.186,98.809) 107.186,98.933 ; P7.1@107.308,99.037 cw(c107.186,99.057) 107.186,98.933 ; P7.1@107.95,98.933 107.186,98.933
  Bottom Layer w0.2: v1(94.488,88.392) 94.488,88.519 94.666,88.697 ; v1@94.624,88.456 cw(c94.817,88.546) 94.666,88.697 ; v1@96.178,90.528 cw(c95.816,90.528) 96.072,90.272 cw(c96.328,90.016) v1@96.328,90.378 ; v1(96.328,90.528) 94.666,88.866 94.666,88.697
MCO: CLK.1 U1.41 | length 3.5
  Top Layer w0.254: U1.41@93.505,80.641 CLK.1@96.008,80.641 ; 95.089,80.641 ccw(c95.089,81.314) CLK.1@95.565,80.838 ; 95.109,80.641 cw(c95.109,79.996) CLK.1@95.565,80.452
NetATN1_1: ATN1.1 C20.1 | length 5.6
  Top Layer w1.6: ATN1.1@110.327,58.257 110.327,63.899
NetB1_1: B1.1 EMI1.3 | length 2.7
  Top Layer w0.5: B1.1@98.552,67.564 100.28,67.564 EMI1.3@100.447,67.731 ; 99.407,67.564 ccw(c99.407,68.496) EMI1.3@100.066,67.837
NetB2_1: B2.1 C31.1 C32.1 C33.1 P4.1 | length 17.5
  Top Layer w0.5: B2.1@114.746,99.374 114.746,98.266 115.256,97.756 C32.1@116.128,97.756 ; 117.039,97.756 cw(c117.039,96.185) P4.1@118.364,97.028 ; P4.1@117.942,96.76 ccw(c116.128,95.606) C32.1@116.128,97.756 ; P4.1@118.01,97.382 ccw(c116.582,98.81) 118.602,98.81 ; C31.1@118.602,99.441 118.602,97.266 P4.1@118.364,97.028 ; C32.1@116.128,97.756 117.636,97.756 P4.1@118.364,97.028
  Bottom Layer w0.5: 117.614,97.393 cw(c117.614,96.439) P4.1@118.364,97.028 117.999,97.393 C33.1@116.586,97.393 cw(c116.586,95.633) P4.1@117.971,96.719
NetC1_1: C1.1 D1.2 U1.1 | length 11.2
  Top Layer w0.2: v1@80.158,85.238 cw(c79.902,84.982) 80.264,84.982 cw(c80.626,84.982) v1@80.37,85.238 ; v1(80.264,85.344) 80.264,84.836 80.959,84.141 U1.1@81.755,84.141 ; 80.824,84.276 cw(c80.689,84.141) U1.1@80.88,84.141
  Bottom Layer w0.2: v1@80.158,85.45 ccw(c79.902,85.706) 80.264,85.706 ccw(c80.626,85.706) v1@80.37,85.45 ; C1.1@80.182,86.171 cw(c79.984,85.973) 80.264,85.973 ; v1@80.189,85.474 ccw(c80.008,85.787) 80.357,85.693 ; v1(80.264,85.344) 80.264,86.26 C1.1@80.394,86.39 80.879,85.905 ; v1(80.264,85.344) cw(c81.433,85.345) C1.1@80.606,86.171 ; 80.264,85.828 cw(c80.95,85.828) C1.1@80.465,86.313 ; 80.358,85.694 ccw(c80.708,85.6) v1@80.394,85.419 ; C1.1@80.411,86.084 cw(c80.445,85.47) 80.879,85.905 ; C1.1@80.694,86.373 ccw(c81.327,86.353) 80.879,85.905 ; D1.2@81.866,85.657 ccw(c81.269,85.06) 81.269,85.905 ccw(c81.269,86.75) D1.2@81.866,86.152 ; D1.2@82.114,85.905 80.879,85.905
NetC20_2: C20.2 C23.2 L3.2 | length 4
  Top Layer w0.2: C20.2@110.115,66.535 ccw(c109.603,67.047) 110.327,67.047 ccw(c111.052,67.047) C20.2@110.54,66.535 ; L3.2@110.115,67.852 cw(c109.603,67.34) 110.327,67.34 cw(c111.052,67.34) L3.2@110.54,67.852 ; C20.2@110.327,66.323 110.327,67.194 L3.2@110.327,68.064
NetC21_1: C21.1 L1.2 L2.1 | length 6.8
  Top Layer w0.2: C21.1@109.438,75.037 110.339,74.136 110.339,74.103 ; C21.1@109.445,74.737 cw(c109.445,74.028) 109.946,74.529 ; C21.1@109.745,75.037 ccw(c110.485,75.037) 109.962,74.514 ; L2.1@110.127,73.455 ccw(c109.615,73.967) 110.339,73.967 ccw(c111.064,73.967) L2.1@110.552,73.455 ; L2.1@110.339,73.243 110.339,74.103 ; 110.693,74.457 ccw(c110.17,74.98) L1.2@110.91,74.98 ; 110.709,74.472 cw(c111.21,73.971) L1.2@111.21,74.68 ; L1.2@111.216,74.98 110.339,74.103
NetC22_2: C22.2 L2.2 L3.1 | length 3.9
  Top Layer w0.2: L3.1@110.122,70.026 ccw(c109.596,70.552) 110.339,70.552 ; L2.2@110.127,71.281 cw(c109.615,70.769) 110.339,70.769 cw(c111.064,70.769) L2.2@110.552,71.281 ; L3.1@110.339,69.826 110.339,70.703 L2.2@110.339,71.493 ; 110.339,70.525 ccw(c111.045,70.525) L3.1@110.546,70.026
NetC25_2: C25.2 U2.5 | length 2.9
  Top Layer w0.2: C25.2@108.868,86.78 cw(c108.868,86.04) 109.392,86.563 ; C25.2@108.868,87.086 109.581,86.373 U2.5@109.581,85.63 ; C25.2@109.168,87.08 ccw(c109.877,87.08) 109.376,86.578
NetC26_2: C26.2 L4.2 | length 1.7
  Top Layer w0.68: C26.2@106.009,78.388 106.071,78.45 L4.2@107.688,78.45
NetC43_1: C43.1 C44.2 C45.2 J3.1 U4.2 | length 31.5
  Top Layer w0.6: U4.2@72.569,98.164 cw(c71.246,96.841) 73.117,96.841 cw(c74.988,96.841) U4.2@73.665,98.164 ; U4.2@72.94,93.214 ccw(c72.513,93.641) 73.117,93.641 ccw(c73.721,93.641) U4.2@73.294,93.214 ; U4.2@73.117,92.512 U4.2@73.117,98.712 78.138,98.712 C43.1@78.359,98.933 78.613,99.187 C44.2@80.911,99.187 80.911,97.459 C45.2@80.961,97.409 80.961,95.696 J3.1@81.407,95.25 ; U4.2@74.34,98.164 cw(c75.663,96.841) 75.663,98.712 cw(c75.663,100.583) U4.2@74.34,99.26 ; 76.322,98.712 ccw(c76.322,100.582) C43.1@77.644,99.26 ; C43.1@79.074,98.606 cw(c80.476,97.204) C44.2@80.476,99.187 ; C44.2@80.734,98.86 cw(c80.307,98.433) 80.911,98.433 cw(c81.515,98.433) C44.2@81.088,98.86 ; C44.2@80.734,99.01 ccw(c80.307,98.583) 80.307,99.187 ccw(c80.307,99.791) C44.2@80.734,99.364 ; 80.961,96.568 ccw(c82.725,96.568) J3.1@81.478,95.321
NetC47_2: C47.2 C48.2 C49.2 C50.2 J4.1 U5.5 | length 11.6
  Top Layer w0.5: J4.1@94.996,65.659 C50.2@96.709,65.659 ; C47.2@96.172,63.316 cw(c95.848,62.709) v2@96.536,62.709 ; C47.2@96.172,64.446 ccw(c95.866,65.024) v2(96.52,65.024) ; 96.183,65.659 ccw(c96.183,66.433) C50.2@96.73,65.886 ; v2@96.52,64.961 cw(c97.323,64.961) C50.2@96.913,65.651 ; v2@96.536,62.738 96.536,63.658 C47.2@96.313,63.881 96.52,64.088 v2(96.52,65.024) ; v2@96.567,65.04 cw(c97.131,65.237) C50.2@96.709,65.659 ; v2(96.52,65.024) 96.52,65.47 C50.2@96.709,65.659
  Bottom Layer w0.5: v2@96.489,62.777 ccw(c95.91,63.5) C48.2@96.836,63.5 96.836,63.054 v2(96.52,62.738) ccw(c96.023,63.235) C48.2@96.693,63.448 ; v2(96.52,65.024) 96.709,65.024 C49.2@96.836,65.151 cw(c96.618,65.369) C49.2@96.534,65.072
NetD2_1: D2.1 RP1.8 | length 7.2
  Top Layer w0.15: D2.1@94.098,63.48 94.976,63.48 v1(94.956,63.5) ; D2.1@94.222,63.356 cw(c94.52,63.058) 94.52,63.48 cw(c94.52,63.902) D2.1@94.222,63.604 ; D2.1@94.328,63.25 cw(c94.883,62.695) 94.883,63.48 cw(c94.883,64.265) D2.1@94.328,63.71 ; D2.1@94.485,63.48 ccw(c94.485,63.971) v1@94.832,63.624 ; 94.547,63.39 ccw(c94.438,63.799) v1@94.804,63.588 ; 94.549,63.391 cw(c94.658,62.984) v1@94.869,63.348 ; 94.554,63.568 ccw(c94.636,63.874) v1@94.842,63.633 ; 94.582,63.48 cw(c94.582,63.126) v1@94.832,63.376 ; 94.627,63.548 cw(c94.552,63.267) v1@94.804,63.412
  Bottom Layer w0.15: RP1.8@94.149,63.233 RP1.8@94.689,63.233 ; RP1.8@94.533,63.208 ccw(c94.56,63.454) 94.735,63.279 ; RP1.8@94.55,63.357 ccw(c94.604,63.852) v1(94.956,63.5) ; RP1.8@94.584,63.192 ccw(c94.386,63.535) v1@94.781,63.511 ; v1@94.782,63.486 cw(c94.463,63.459) RP1.8@94.689,63.233 ; v1@94.942,63.326 ccw(c94.915,63.007) RP1.8@94.689,63.233 ; v1(94.956,63.5) RP1.8@94.689,63.233
NetD3_1: D3.1 R18.2 | length 4.1
  Bottom Layer w0.2: D3.1@67.465,86.309 ccw(c66.921,86.854) 67.691,86.854 ; R18.2@67.479,87.7 cw(c66.967,87.188) 67.691,87.188 cw(c68.415,87.188) R18.2@67.903,87.7 ; D3.1@67.671,86.097 67.691,86.117 R18.2@67.691,87.912 ; 67.691,86.789 ccw(c68.369,86.789) D3.1@67.89,86.309
NetD4_1: D4.1 RP1.4 | length 4.8
  Top Layer w0.15: D4.1@94.098,61.829 94.762,61.829 ; D4.1@94.355,61.63 cw(c94.762,61.313) 94.762,61.829 ; D4.1@94.355,62.028 ccw(c94.762,62.345) 94.762,61.829 ; v1@94.824,61.628 ccw(c94.603,61.67) 94.762,61.829 ; v1@94.963,61.767 cw(c94.921,61.988) 94.762,61.829 ; v1(94.996,61.595) 94.762,61.829
  Bottom Layer w0.15: RP1.4@94.149,61.633 94.958,61.633 v1(94.996,61.595) ; RP1.4@94.482,61.633 cw(c94.482,61.081) v1@94.872,61.471 ; RP1.4@94.624,61.545 cw(c94.838,61.331) 94.838,61.633 cw(c94.838,61.935) RP1.4@94.624,61.721 ; RP1.4@94.665,61.633 ccw(c94.665,61.926) v1@94.872,61.719 ; v1@94.829,61.542 ccw(c94.644,61.484) 94.694,61.672 ccw(c94.742,61.85) v1@94.873,61.719
NetD5_1: D5.1 RP1.2 | length 9.1
  Top Layer w0.15: D5.1@94.098,60.178 v1(94.849,60.178) ; D5.1@94.226,60.058 cw(c94.502,59.798) 94.502,60.178 cw(c94.502,60.558) D5.1@94.226,60.298 ; D5.1@94.335,59.956 cw(c94.849,59.473) v1(94.849,60.178) ; D5.1@94.335,60.4 ccw(c94.849,60.883) v1(94.849,60.178) ; v1@94.689,60.107 ccw(c94.421,59.989) 94.496,60.272 ccw(c94.572,60.556) v1@94.746,60.319 ; v1@94.689,60.249 cw(c94.421,60.367) 94.496,60.084 cw(c94.572,59.8) v1@94.746,60.037 ; v1@94.725,60.054 ccw(c94.427,59.756) 94.427,60.178 ccw(c94.427,60.6) v1@94.725,60.302
  Bottom Layer w0.15: RP1.2@94.084,60.978 ccw(c94.183,60.946) RP1.2@94.109,60.873 ; RP1.2@94.149,60.833 v1@94.804,60.178 ; RP1.2@94.227,60.933 ccw(c94.446,60.862) RP1.2@94.283,60.699 ; RP1.2@94.369,60.887 ccw(c94.709,60.777) 94.457,60.525 ; 94.473,60.509 ccw(c94.849,60.884) v1@94.849,60.353 ; 94.476,60.619 ccw(c94.949,60.892) v1@94.873,60.351 ; RP1.2@94.512,60.841 ccw(c94.972,60.693) 94.63,60.352 ; 94.582,60.4 cw(c94.36,60.178) v1@94.674,60.178 ; 94.63,60.353 ccw(c94.895,60.506) v1@94.852,60.203 ; 94.635,60.47 ccw(c94.839,60.588) v1@94.845,60.353 ; 94.651,60.443 cw(c94.4,60.298) v1@94.68,60.223 ; RP1.2@94.655,60.795 ccw(c95.234,60.608) v1@94.804,60.178 ; v1(94.849,60.178) v1@94.804,60.178
NetD6_2: D6.2 D7.1 | length 4.9
  Bottom Layer w0.4: D6.2@100.33,99.187 D7.1@102.235,99.187 ; D6.2@100.763,98.904 cw(c101.446,98.221) 101.446,99.187 cw(c101.446,100.153) D6.2@100.763,99.47 ; D7.1@101.802,98.904 ccw(c101.119,98.221) 101.119,99.187 ccw(c101.119,100.153) D7.1@101.802,99.47
NetD7_2: D7.2 R8.2 | length 13.7
  Top Layer w0.4: R8.2@96.901,96.774 97.409,97.282 ; R8.2@96.995,96.88 cw(c97.965,95.91) 97.965,97.282 ; R8.2@97.278,96.597 cw(c98.931,94.944) 98.931,97.282 ; R8.2@97.331,96.873 cw(c97.671,97.02) 97.409,97.282 ; 103.836,98.248 ccw(c102.897,99.187) D7.2@104.225,99.187 ; 104.198,98.61 cw(c104.625,98.183) D7.2@104.625,98.787 ; D7.2@104.775,99.187 102.87,97.282 97.409,97.282